# EAGLE board source_eagle (EAGLE 9.6.2)
REV: A
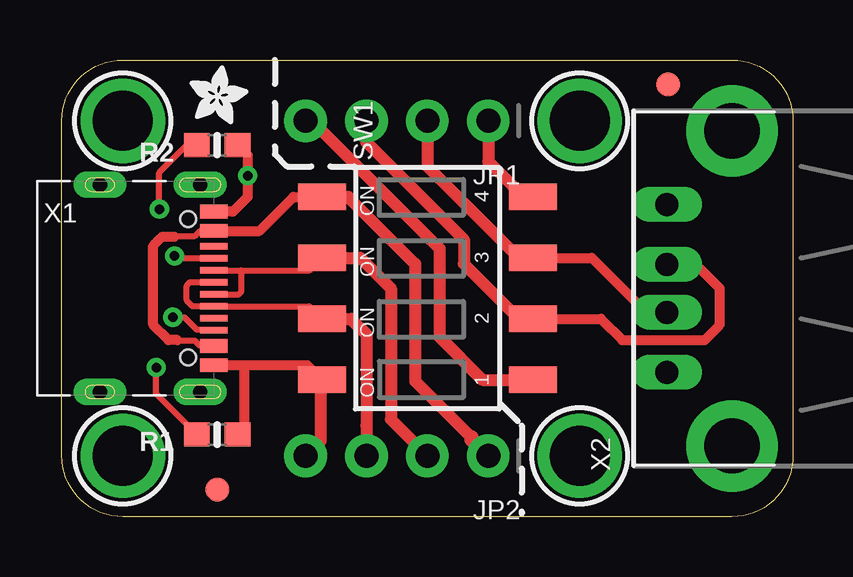
[diagram p0: board, top side]
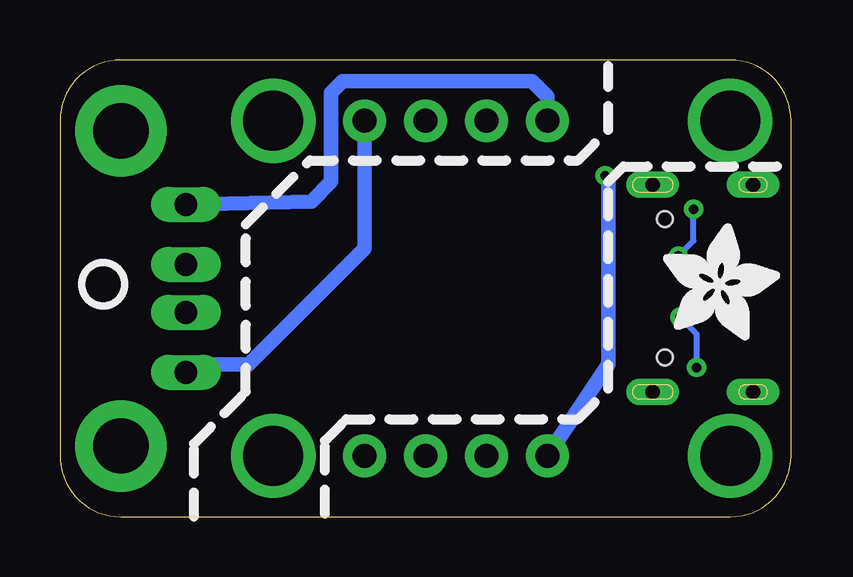
[diagram p1: board, bottom side, seen from below]

Size 30.48 x 19.05 mm. Coordinates in mm from the lower left corner, seen from the top.
Outline: 30.48,16.51 30.48,2.54 arc-90 27.94,0 2.54,0 arc-90 0,2.54 0,16.51 arc-90 2.54,19.05 27.94,19.05 arc-90 30.48,16.51
Copper layers (1*16): Top 0.035mm / dielectric 1.5mm / Bottom 0.035mm
Design rules "adafruit": minimum track width 8mil, minimum drill 15.5mil, track to track 8mil, track to pad 8mil, pad to pad 8mil, via to via 8mil, smd to smd 8mil, copper to edge 10mil, drill to drill 8mil, minimum pad ring 10mil, minimum via ring 8mil, stop-mask expansion 2mil, vias tented up to drill 20mil, thermal gap 10mil

## Footprints (pad centres in the part's own frame; a part is rotated, then mirrored left to right if it is on the bottom)
FIDUCIAL_1MM = smd 1 x 1: 1 0,0
1X04_ROUND = drill 1 pad 1.778: 1 -3.81,0; 2 -1.27,0; 3 1.27,0; 4 3.81,0
0603-NO = smd 1.075 x 1: 1 -0.85,0; 2 0.85,0
DIPSWITCH_4PIN = smd 1.1 x 2: 1OFF -3.81,-4.4; 1ON -3.81,4.4; 2OFF -1.27,-4.4; 2ON -1.27,4.4; 3OFF 1.27,-4.4; 3ON 1.27,4.4; 4OFF 3.81,-4.4; 4ON 3.81,4.4
MOUNTINGHOLE_2.5_PLATED = drill 2.5 pad 3.2: P$1 0,0
USB_C_CUSB31-CFM2AX-01-X = smd 0.575 x 1.15: A1B12 -3.2,2.275; A4B9 -2.4,2.275; B1A12 3.2,2.275; B4A9 2.4,2.275 | smd 0.275 x 1.15: A5 -1.25,2.275; A6 -0.25,2.275; A7 0.25,2.275; A8 1.25,2.275; B5 1.75,2.275; B6 0.75,2.275; B7 -0.75,2.275; B8 -1.75,2.275 | drill 0.6 pad 1 long: M1 -4.32,1.7; M2 4.32,1.7; M3 -4.32,-2.48; M4 4.32,-2.48 | hole 0.65: 2.89,1.2; -2.89,1.2
USB_HOST-PTH = drill 0.95 long: D+ 1,6.52; D- -1,6.52; GND 3.5,6.52; VBUS -3.5,6.52 | drill 2.3 pad 3.81: S1 -6.57,3.81; S2 6.57,3.81

## Placement (x,y rotation side)
FID1  FIDUCIAL_1MM  [FIDUCIAL_1MM]  25.27,18.03 180 top
FID2  FIDUCIAL_1MM  [FIDUCIAL_1MM]  6.48,1.14 180 top
JP1  [1X04_ROUND]  13.97,16.51 180 top
JP2  [1X04_ROUND]  13.97,2.54 180 top
PLABEL0  [PLABEL0]  8.64,13.34 0 top
PLABEL1  [PLABEL1]  21.97,13.34 0 top
PLABEL2  [PLABEL2]  8.64,10.92 0 top
PLABEL3  [PLABEL3]  21.97,10.92 0 top
PLABEL4  [PLABEL4]  8.64,8.26 0 top
PLABEL5  [PLABEL5]  22.23,8.26 0 top
PLABEL6  [PLABEL6]  8.38,5.71 0 top
PLABEL7  [PLABEL7]  22.23,5.71 0 top
PLABEL8  [PLABEL8]  10.03,18.16 0 top
PLABEL9  [PLABEL9]  9.91,0.89 0 top
PLABEL10  [PLABEL10]  12.7,0.89 0 top
PLABEL11  [PLABEL11]  12.83,18.16 0 top
PLABEL12  [PLABEL12]  15.24,18.16 0 top
PLABEL13  [PLABEL13]  15.37,0.89 0 top
PLABEL14  [PLABEL14]  17.91,0.89 0 top
PLABEL15  [PLABEL15]  17.78,18.16 0 top
PLABEL16  [PLABEL16]  14.86,9.27 0 bottom
PLABEL17  [PLABEL17]  12.45,0.89 0 bottom
PLABEL18  [PLABEL18]  14.99,0.89 0 bottom
PLABEL19  [PLABEL19]  17.78,0.89 0 bottom
PLABEL20  [PLABEL20]  9.53,0.89 0 bottom
PLABEL21  [PLABEL21]  9.78,18.16 0 bottom
PLABEL22  [PLABEL22]  12.45,18.16 0 bottom
PLABEL23  [PLABEL23]  14.99,18.16 0 bottom
PLABEL24  [PLABEL24]  17.78,18.16 0 bottom
R1  5.1K  [0603-NO]  6.48,3.43 180 top
R2  5.1K  [0603-NO]  6.48,15.49 180 top
SW1  SDA04H1SBD  [DIPSWITCH_4PIN]  15.24,9.53 90 top
U$1  MOUNTINGHOLE2.5  [MOUNTINGHOLE_2.5_PLATED]  2.54,2.54 0 top
U$2  MOUNTINGHOLE2.5  [MOUNTINGHOLE_2.5_PLATED]  2.54,16.51 0 top
U$3  MOUNTINGHOLE2.5  [MOUNTINGHOLE_2.5_PLATED]  21.59,2.54 0 top
U$4  MOUNTINGHOLE2.5  [MOUNTINGHOLE_2.5_PLATED]  21.59,16.51 0 top
U$5  [ADAFRUIT_2.5MM]  5.33,16.38 0 top
U$6  [ADAFRUIT_5MM]  5.33,7.37 0 bottom
U$8  [PCBFEAT-REV-040]  28.68,9.7 180 bottom
X1  USB Type C  [USB_C_CUSB31-CFM2AX-01-X]  4.06,9.53 270 top
X2  USB A Host  [USB_HOST-PTH]  31.75,9.53 90 top

## Library data of the parts
FID1 FID2 = microbuilder; BOM: EXCLUDE
JP1 JP2 R1 R2 U$5 U$6 U$8 = microbuilder
PLABEL0 PLABEL1-PLABEL24 = pinguin
SW1 = adafruit_electromech
U$1-U$4 = adafruit_electromech; BOM: EXCLUDE
X1 = adafruit_electromech; LCSC: C165948
X2 = adafruit_electromech; FORCETHM: 1

## Nets
G_F: JP2.4 R1.1 R2.1 SW1.1ON X1.A1B12 X1.B1A12
G_M: JP1.4 SW1.1OFF X2.GND
N$3: R1.2 X1.B5
N$4: R2.2 X1.A5
N_F: JP2.2 SW1.3ON X1.A7 X1.B7
N_M: JP1.2 SW1.3OFF X2.D-
P_F: JP2.3 SW1.2ON X1.A6 X1.B6
P_M: JP1.3 SW1.2OFF X2.D+
V_F: JP2.1 SW1.4ON X1.A4B9 X1.B4A9
V_M: JP1.1 SW1.4OFF X2.VBUS

## Tracks (layer width: path | path; a pad name or v marks a point on that pad's centre or on a via)
G_F  (via drill 0.39)
  Top 0.406: X1.B1A12 7.62,6.33 | 7.62,6.33 10.23,6.33 SW1.1ON | R1.1 7.62,3.72 7.62,6.33 | R2.1 7.75,15.07 v7.75,14.22 7.75,13.34 7.14,12.72 X1.A1B12
  Top 0.508: 10.79,5.67 10.79,3.17 JP2.4
  Top 0.61: SW1.1ON 10.79,5.67
  Bottom 0.61: JP2.4 7.62,6.35 7.62,14.1 v7.75,14.22
G_M
  Top 0.508: JP1.4 10.41,16.51 15.75,11.18 15.75,7.49 17.53,5.71 SW1.1OFF
  Bottom 0.61: JP1.4 10.16,17.53 10.79,18.16 18.7,18.16 19.18,17.68 19.18,13.97 20,13.15 X2.GND
N$3  (via drill 0.39)
  Top 0.254: R1.2 3.94,5.12 v3.94,6.22 | X1.B5 6.31,7.81 5.63,7.81 5.12,8.32 v4.63,8.32
  Bottom 0.254: v3.94,6.22 3.94,7.62 v4.63,8.32
N$4  (via drill 0.39)
  Top 0.254: X1.A5 4.8,10.78 v4.7,10.88 | v4.06,12.83 4.06,14.35 5.21,15.49 R2.2
  Bottom 0.254: v4.7,10.88 4.06,11.51 v4.06,12.83
N_F
  Top 0.254: X1.B7 7.49,10.28 | 7.49,10.28 10.32,10.28 SW1.3ON | X1.A7 7.37,9.28 7.49,9.4 7.49,10.28
  Top 0.508: SW1.3ON 12.45,10.79 13.72,9.53 13.72,4.06 JP2.2
N_M
  Top 0.406: SW1.3OFF 22.1,10.79 24.24,8.65 X2.D-
  Top 0.508: JP1.2 15.24,14.61 19.05,10.79 SW1.3OFF
P_F
  Top 0.254: SW1.2ON 10.32,8.78 X1.B6 5.45,8.78 5.21,9.02 5.21,9.65 5.33,9.78 5.34,9.78 X1.A6
  Top 0.508: SW1.2ON 12.06,8.26 12.7,7.62 12.7,3.81 JP2.3
P_M
  Top 0.406: SW1.2OFF 22.48,8.26 23.37,7.37 26.8,7.37 27.43,8 27.43,9.53 26.3,10.65 X2.D+
  Top 0.508: SW1.2OFF 19.05,8.26 16.76,10.54 16.76,11.56 12.7,15.62 JP1.3
V_F
  Top 0.254: X1.B4A9 5.77,7.12 5.56,7.34 4.85,7.34 4.83,7.37 | X1.A4B9 5.77,11.93 5.56,11.71 4.72,11.71 4.7,11.68
  Top 0.406: X1.A4B9 8.24,11.93 9.65,13.34 SW1.4ON | 4.83,7.37 4.45,7.37 3.81,8 3.81,11.3 4.19,11.68 4.7,11.68
  Top 0.508: SW1.4ON 11.94,13.34 14.73,10.54 14.73,5.66 17.09,3.3
  Top 0.61: 17.09,3.3 17.09,3.23 JP2.1
V_M
  Top 0.508: SW1.4OFF 19.26,13.34 17.78,14.81 JP1.1
  Bottom 0.61: JP1.1 17.78,11.18 22.61,6.35 25.03,6.35 X2.VBUS

## Text on the board
Pinguin_tBackup: G | D+ | D- | 5V | 5V | 5V | D- | D- | D+ | D+ | GND | GND | G | D+ | D- | 5V
Pinguin_bBackup: GND | D+ | D- | 5V | USB LS/FS / Switchable / Power/Data / 100mA Max | GND | D+ | D- | 5V